# Altium PCB 1.PcbDoc (part 1 of 2)
Units mil, origin at the board's own origin, x right, y up, seen from the top; angles counter-clockwise.
Board outline 9055.12 x 5905.51 mil, 2 copper layers (Top Layer, Bottom Layer); 240 components, 221 nets, 945 pads, 455 vias.
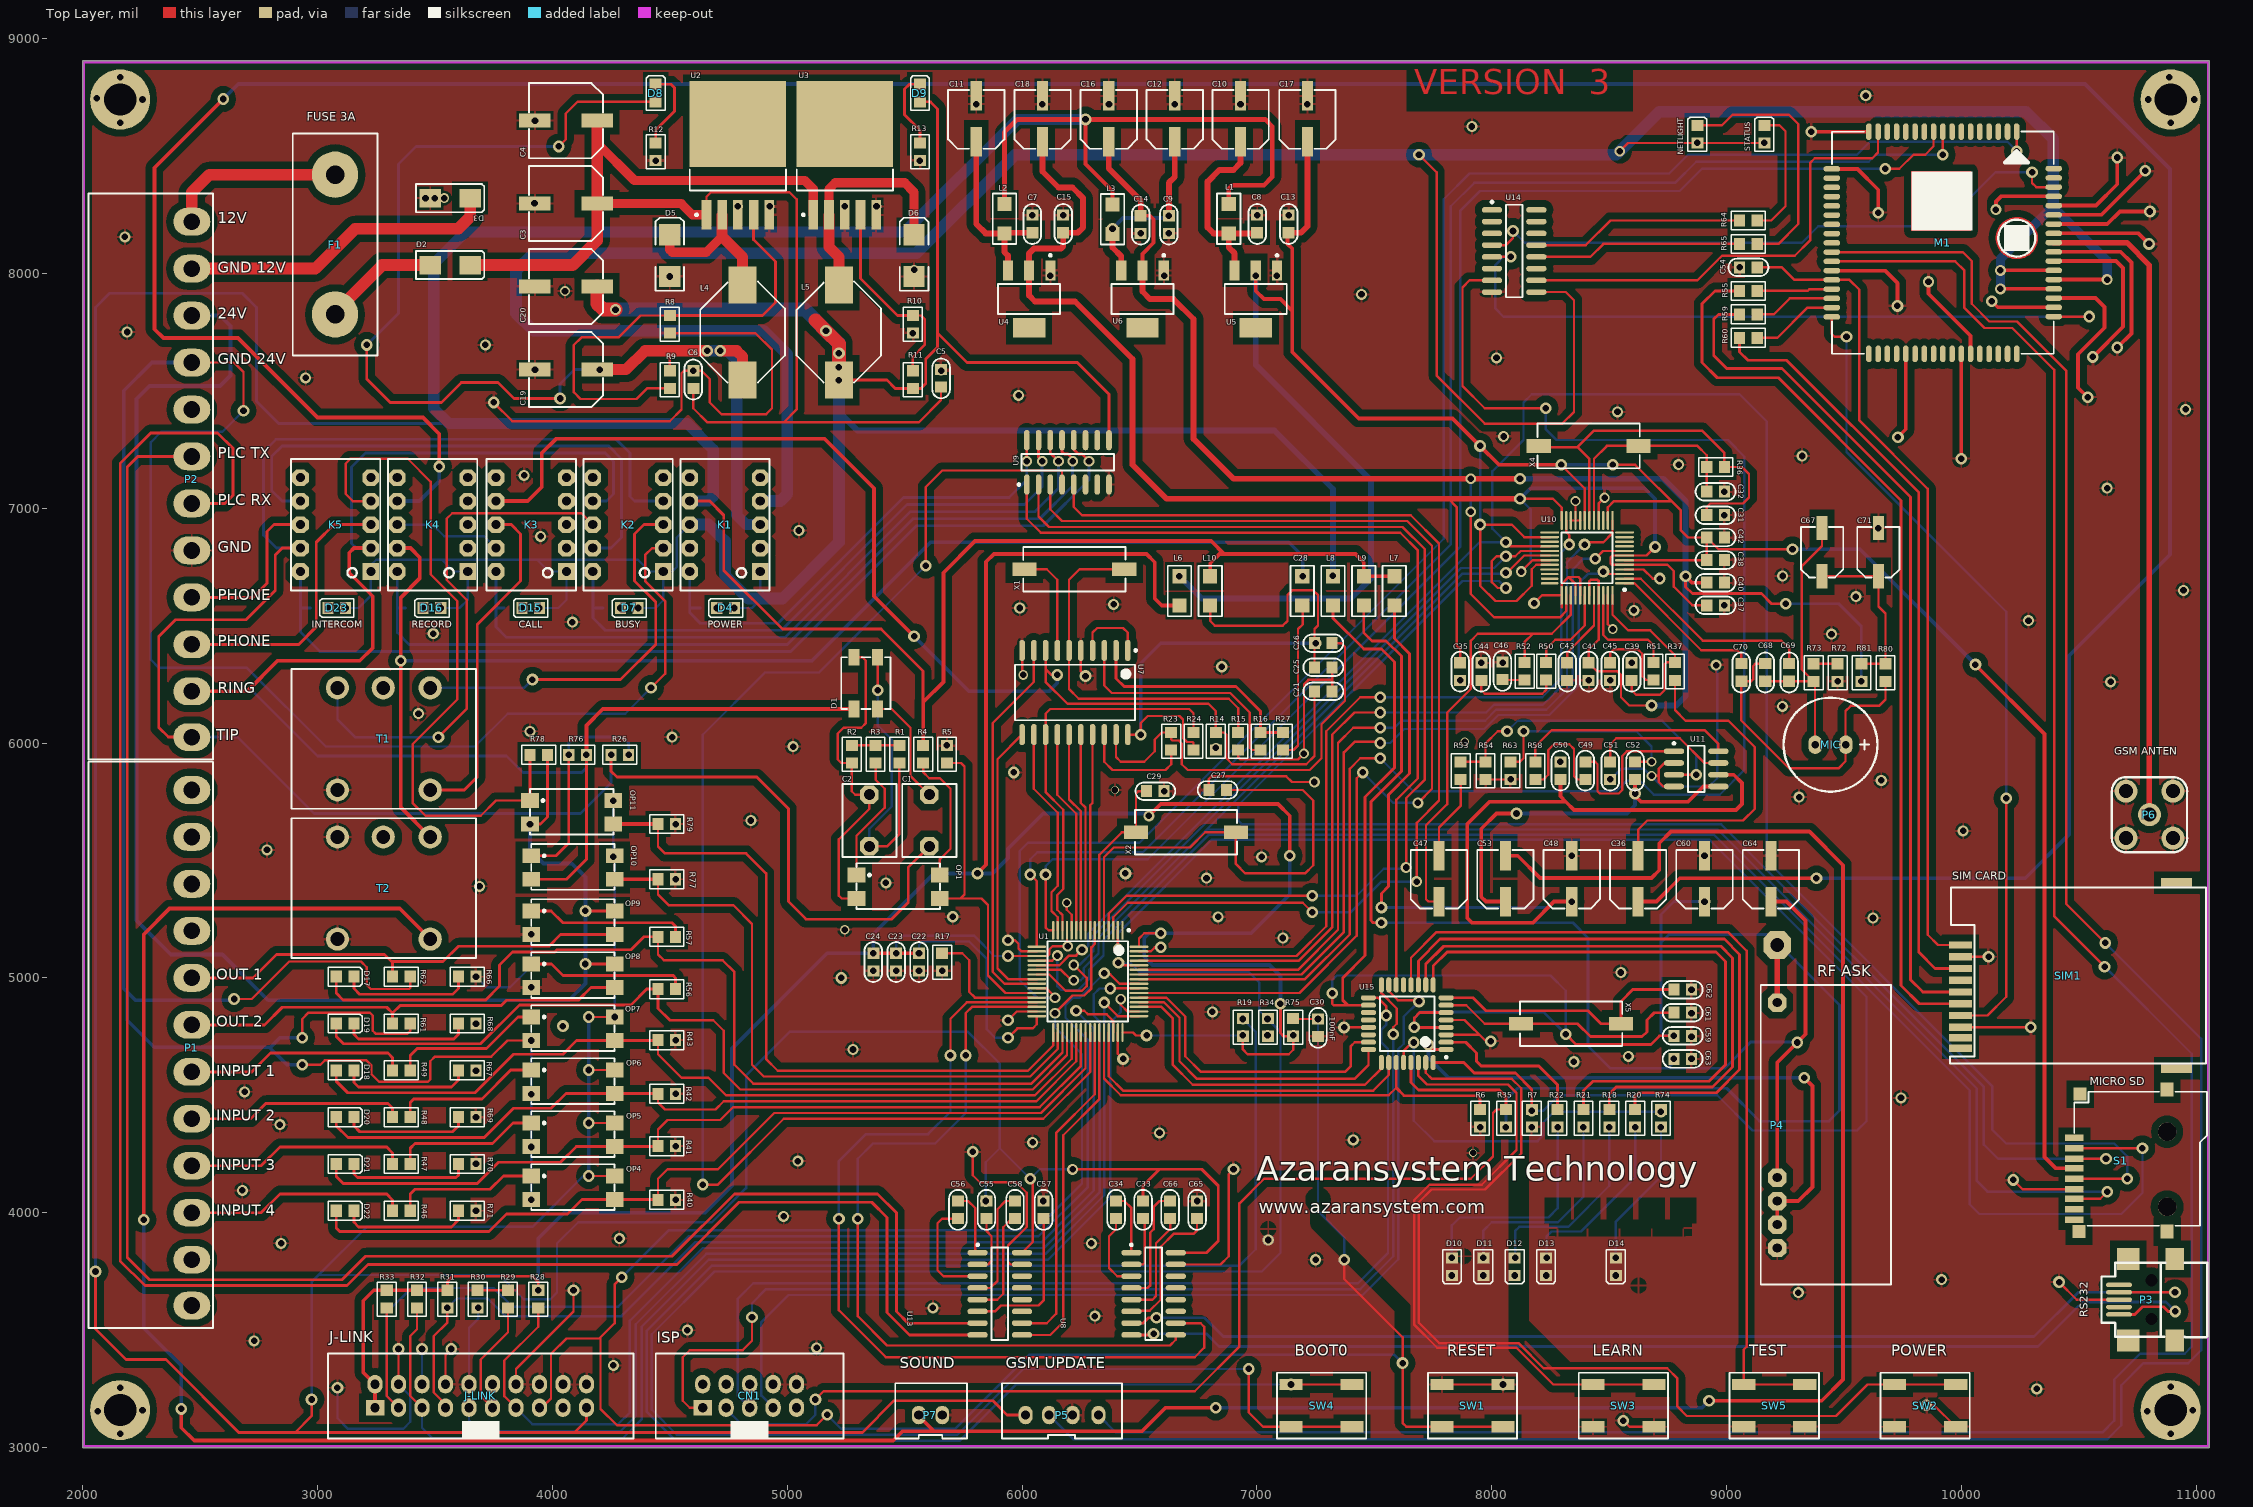
[diagram p0: Top Layer view]
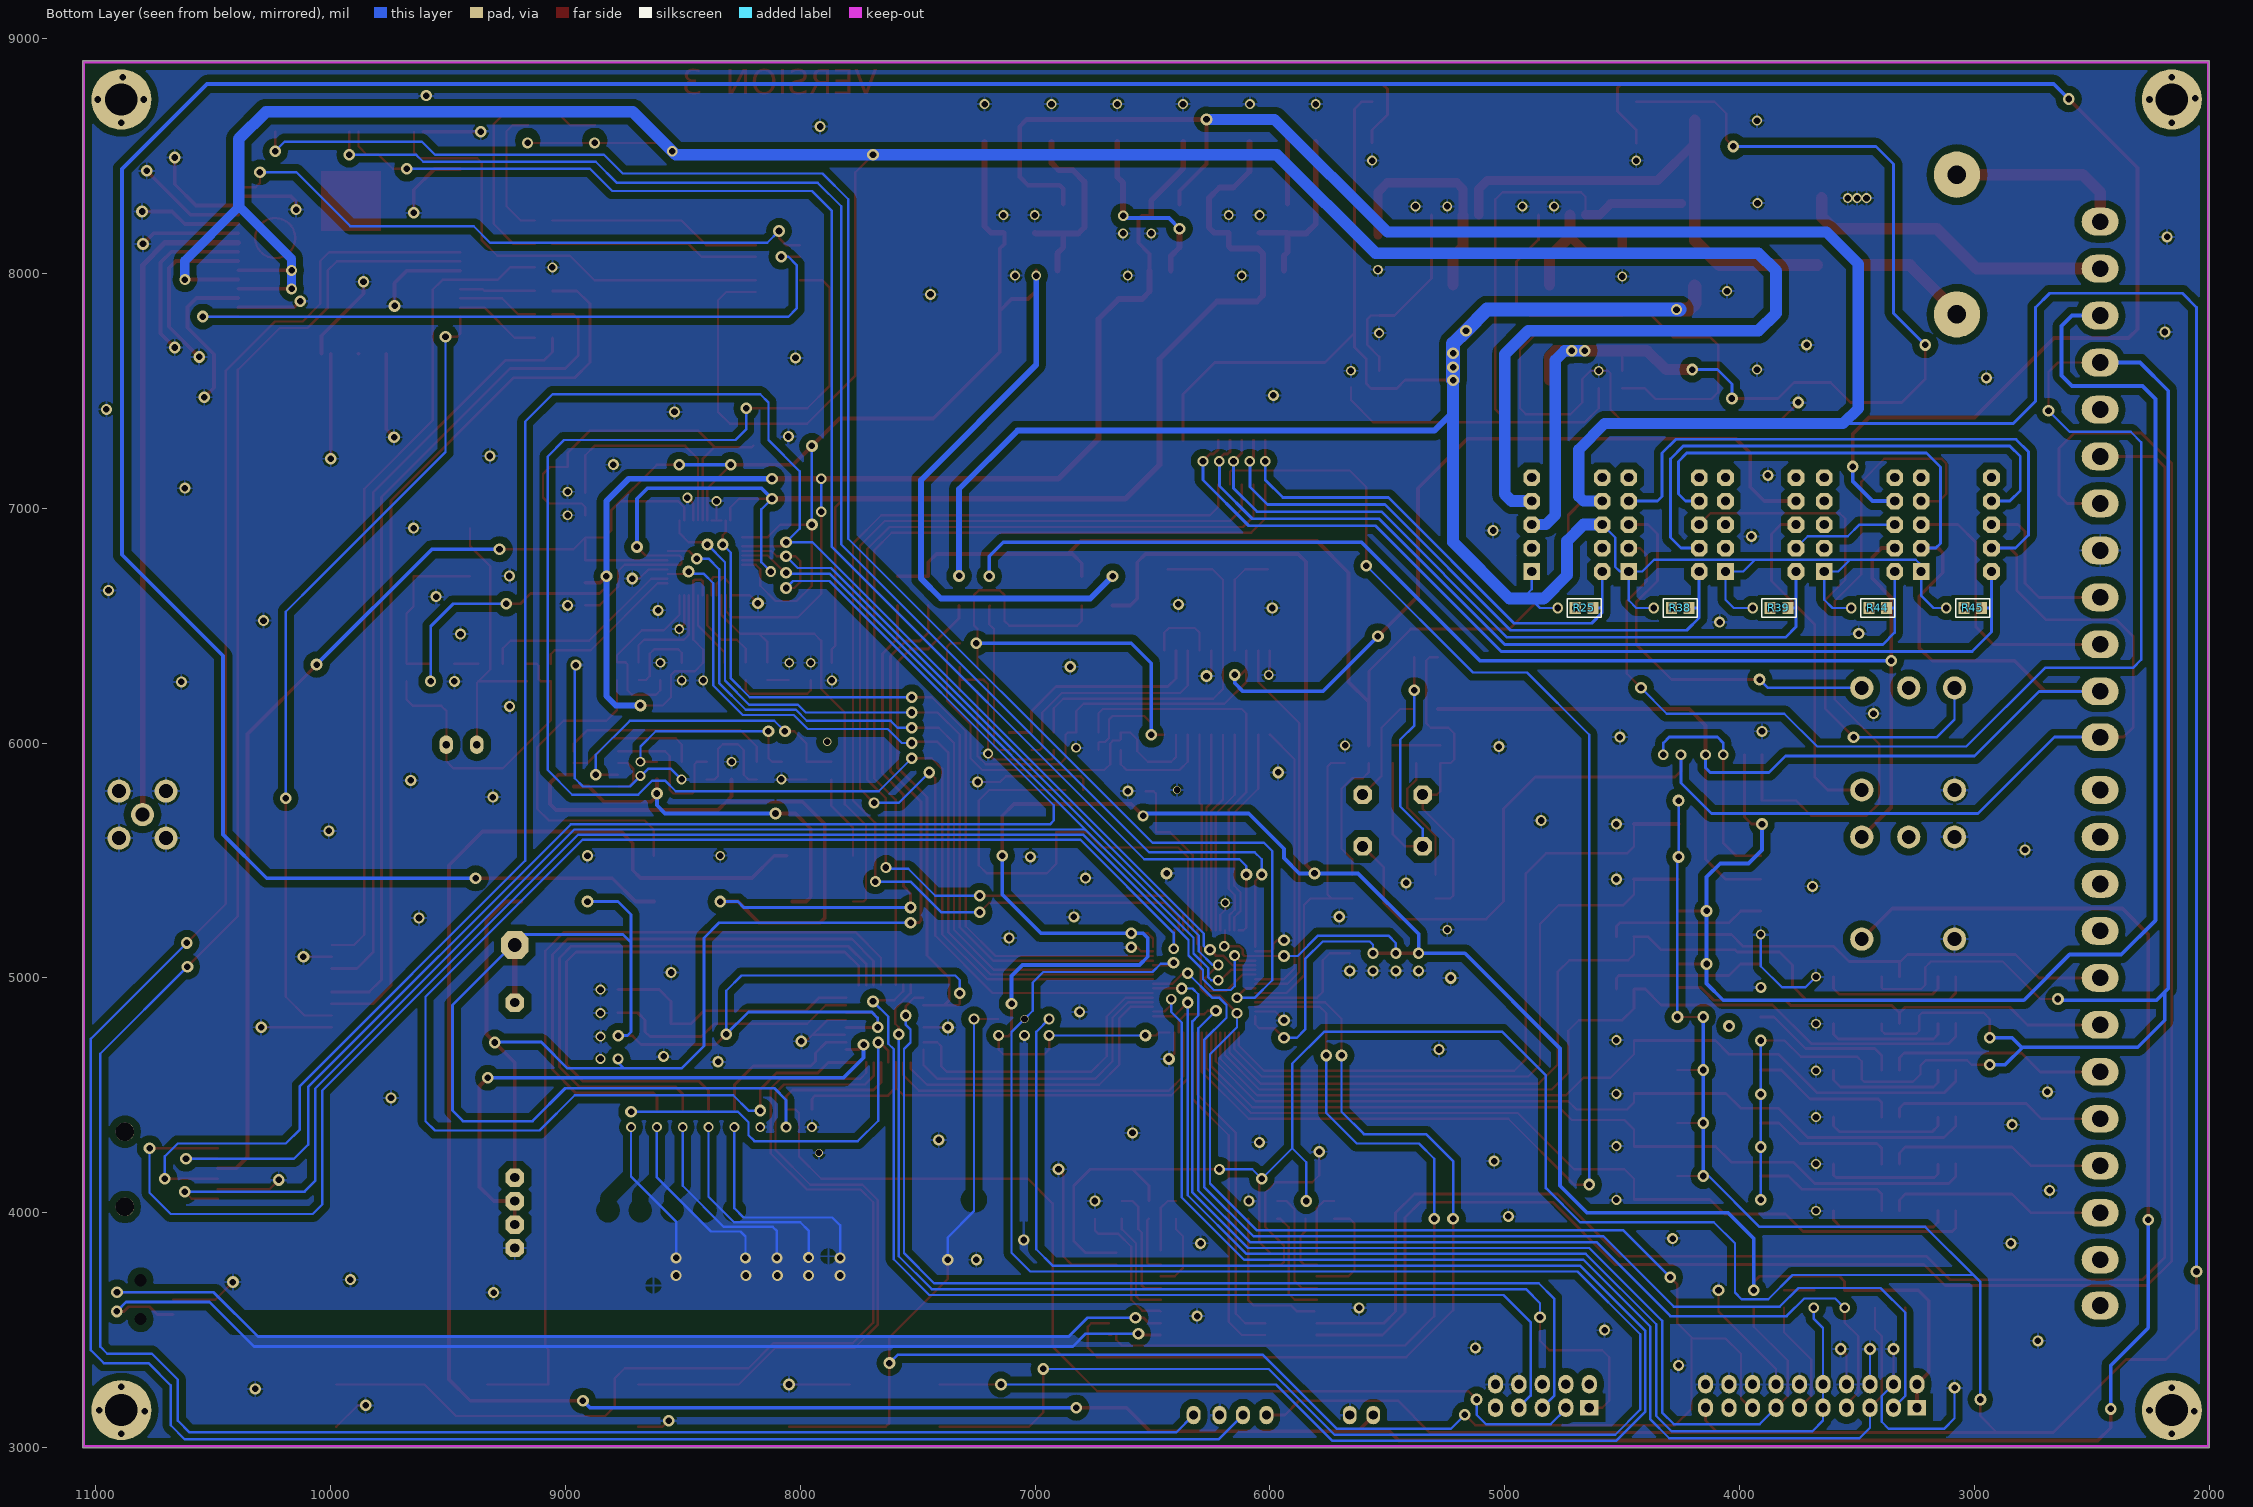
[diagram p1: Bottom Layer view, seen from below]

## Layer stack, top to bottom
Top Layer: signal copper 1.4
Dielectric: dielectric 12.6, FR-4, Dk 4.8
Bottom Layer: signal copper 1.4

## Board outline
2000,3000 11055.12,3000 11055.12,8905.51 2000,8905.51

## Design rules (kind name [scope] priority, off if disabled: settings)
Clearance [All] p1: gap=10
PolygonConnect [All] p1: connectstyle=Relief reliefconductorwidth=10 reliefentries=4 polygonreliefangle="90 Angle" airgapwidth=10
RoutingVias [All] p1: holewidth=31.5 width=62.99 viastyle="Through Hole" minholewidth=28 minwidth=50 maxholewidth=28 maxwidth=50
SilkToSolderMaskClearance SilkscreenOverComponentPads [IsPad] p1: minsilkscreentomaskgap=10 clearancetoexposedcopper=TRUE
SolderMaskExpansion [All] p1: expansion=4
Width [All] p1: maxlimit=200 minlimit=8 preferedwidth=10
27 further rules are at their usual default settings.

## Classes and differential pairs
component class "SmartHome V3": C1 C2 C22 C23 C24 C27 C29 C30 C33 C34 C55 C56 C57 C58 C59 C60 C61 C62 C63 C64 C65 C66 CN1 D1 D4 D7 D10 D11 D12 D13 D14 D15 D16 D17 D18 D19 D20 D21 D22 D23 D? J-LINK K1 L6 L8 L9 OP1 OP4 OP5 OP6 OP7 OP8 OP9 OP11 P1 P2 P3 P4 R1 R2 R3 R4 R5 R6 R7 R17 R18 R19 R20 R21 R22 R25 R28 R29 R30 R31 R32 R33 R34 R35 R38 R39 R40 R41 R42 R43 R44 R45 R46 R47 R48 R49 R56 R57 R61 R62 R66 R67 R68 R69 R70 R71 R74 R75 R77 S1 SW1 SW2 SW3 SW4 SW5 T2 U1 U8 U9 U13 U15 X2 X5
component class SIM900: C54 M1 NETLIGHT P5 P6 R55 R59 R60 R64 R65 SIM1 STATUS U14
component class VS1003: C31 C32 C35 C36 C37 C38 C39 C40 C41 C42 C43 C44 C45 C46 C47 C48 C49 C50 C51 C52 C53 C67 C68 C69 C70 C71 L7 MIC P7 R36 R37 R50 R51 R52 R53 R54 R58 R63 R72 R73 R80 R81 U10 U11 X4

## Components (designator, comment, footprint, x,y, rotation, side; value= is the part's Value field where it differs from the comment)
C1 "100nF / 100V" RAD-0.3 5605,5670 r270 top
C2 "100nF / 100V" RAD-0.3 5350,5670 r270 top
C3 "470UF / 16V" 470UF-SMD 4186,8297 r180 top
C4 "470UF / 16V" 470UF-SMD 4186,8650 r180 top
C5 "100nF" 0805C 5655,7510 r90 top
C6 "100nF" 0805C 4600,7505 r90 top
C7 "100nF" 0805C 6043.65,8167.4 r90 top
C8 "100nF" 0805C 7001.15,8167.4 r90 top
C9 "100nF" 0805C 6625,8250 r270 top
C10 "100uF / 16V SMD" 100UF-SMD 6930,8560 r90 top
C11 "100uF / 16V SMD" 100uf-smd 5805,8560 r90 top
C12 "100uF / 16V SMD" 100uf-smd 6650,8560 r90 top
C13 "100nF" 0805C 7135,8167.4 r90 top
C14 "100nF" 0805C 6505,8250 r270 top
C15 "100nF" 0805C 6175,8167.4 r90 top
C16 "100uF / 16V SMD" 100uf-smd 6369,8560 r90 top
C17 "100uF / 16V SMD" 100uf-smd 7215,8560 r90 top
C18 "100uF / 16V SMD" 100uf-smd 6087,8560 r90 top
C19 "470UF / 16V" 470UF-SMD 4186,7590 r180 top
C20 "470UF / 16V" 470UF-SMD 4186,7943.33 r180 top
C21 "10nF" 0805c 7240,6220 r0 top
C22 "100nF" 0805C 5561.16,5110 r270 top
C23 "100nF" 0805C 5463.82,5110 r270 top
C24 "100nF" 0805C 5366.49,5110 r270 top
C25 "100nF" 0805c 7325,6322.3 r180 top
C26 "100nF" 0805c 7240,6425 r0 top
C27 "15PF" 0805c 6875,5800 r180 top
C28 "100uF / 100V" 1206 7192.86,6715 r270 top
C29 "15PF" 0805c 6525,5795 r0 top
C30 "100nF" 0805C 7260,4830 r270 top
C31 "30pF" 0805c 8910,6970 r0 top
C32 "30pF" 0805c 8910,7070 r0 top
C33 "100nF" 0805C 6514.93,3970 r90 top
C34 "100nF" 0805c 6400,3970 r90 top
C35 "100nF" 0805C 7865,6261.61 r90 top
C36 "100uF / 16V SMD" 100UF-SMD 8622.8,5325 r90 top
C37 "100nF" 0805C 8995,6586.25 r180 top
C38 "100nF" 0805C 8995,6778.75 r180 top
C39 "10nF" 0805C 8595.33,6261.61 r90 top
C40 "100nF" 0805C 8995,6682.5 r180 top
C41 "100nF" 0805C 8412.38,6261.61 r90 top
C42 "100nF" 0805C 8995,6875 r180 top
C43 "100nF" 0805C 8320.9,6261.61 r90 top
C44 "10nF" 0805C 7955,6261.61 r90 top
C45 "10nF" 0805C 8504.06,6346.61 r270 top
C46 "10nF" 0805C 8045,6265 r90 top
C47 "100uF / 16V SMD" 100UF-SMD 7775,5325 r90 top
C48 "100uF / 16V SMD" 100uf-smd 8340.2,5325 r90 top
C49 "100nF" 0805C 8397.94,5840 r90 top
C50 "100nF" 0805c 8292.01,5840 r90 top
C51 "100nF" 0805c 8503.87,5840 r90 top
C52 "100nF" 0805c 8610,5925 r270 top
C53 "100uF / 16V SMD" 100UF-SMD 8057.6,5325 r90 top
C54 "100nF" 0805C 9135,8025 r180 top
C55 "100nF" 0805C 5848.2,3970 r90 top
C56 "100nF" 0805c 5726.6,3970 r90 top
C57 "100nF" 0805c 6091.6,4055 r270 top
C58 "100nF" 0805c 5970,4055 r270 top
C59 "100nF" 0805C 8770,4753.33 r0 top
C60 "100uF / 16V SMD" 100UF-SMD 8905.4,5325 r90 top
C61 "15PF" 0805c 8770,4851.67 r0 top
C62 "15PF" 0805c 8770,4950 r0 top
C63 "100nF" 0805C 8770,4655 r0 top
C64 "100uF / 16V SMD" 100UF-SMD 9188,5325 r90 top
C65 "100nF" 0805c 6745,4055 r270 top
C66 "100nF" 0805c 6630.07,4055 r270 top
C67 "10uF" 10UF-SMD 9406,6735 r90 top
C68 "100pF" 0805C 9164.08,6343 r270 top
C69 "100nF" 0805C 9265.76,6258 r90 top
C70 "100nF" 0805C 9062,6258 r90 top
C71 "10uF" 10UF-SMD 9646,6735 r90 top
CN1 "ISP" IDC2.54-V10D 4840,3220 r0 top locked
D1 "HD08-T" HD08-T 5385,6365 r270 top
D2 "Diode" Diode 3580,8035 r0 top
D3 "Diode" Diode 3580,8320 r0 top
D4 "LED" 0805d 4775,6575 r180 top
D5 "1N5822" SMB 4500,8075 r90 top
D6 "1N5822" SMB 5540,8075 r90 top
D7 "LED" 0805d 4365,6575 r180 top
D8 "LED" 0805D 4440,8730 r90 top
D9 "LED" 0805D 5565,8730 r90 top
D10 "LED" 0805D 7830,3808 r270 top
D11 "LED" 0805D 7963.67,3808 r270 top
D12 "LED" 0805D 8097.33,3808 r270 top
D13 "LED" 0805D 8231,3808 r270 top
D14 "LED" 0805D 8528,3808 r270 top
D15 "LED" 0805d 3945,6575 r180 top
D16 "LED" 0805d 3525,6575 r180 top
D17 "LED" 0805D 3080,5005 r0 top
D18 "LED" 0805D 3080,4606.43 r0 top
D19 "LED" 0805D 3080,4805.71 r0 top
D20 "LED" 0805D 3080,4407.14 r0 top
D21 "LED" 0805D 3080,4207.86 r0 top
D22 "LED" 0805D 3080,4008.57 r0 top
D23 "LED" 0805d 3120,6575 r180 top
F1 "FUSE 3A" FUSE 3075,8420 r270 top
J-LINK "IDC 20" IDC2.54-V20D 3695,3220 r0 top locked
K1 "RELAY 5V" "RELAY G6H" 4885,6730 r180 top locked
K2 "RELAY 5V" "RELAY G6H" 4472.5,6730 r180 top locked
K3 "RELAY 5V" "RELAY G6H" 4060,6730 r180 top locked
K4 "RELAY 5V" "RELAY G6H" 3640,6730 r180 top locked
K5 "RELAY 5V" "RELAY G6H" 3227.5,6730 r180 top locked
L1 "FREAT" 1206 6880,8300 r270 top
L2 "FREAT" 1206 5925,8300 r270 top
L3 "FREAT" 1206 6385,8297.6 r270 top
L4 "100UH" 100uh 4810,7945 r270 top
L5 "100UH" 100uh 5220,7945 r270 top
L6 "FREAT" 1206 6670,6580 r90 top
L7 "FREAT" 1206 7585,6580 r90 top
L8 "FREAT" 1206 7323.57,6580 r90 top
L9 "FREAT" 1206 7455,6715 r270 top
L10 "FREAT" 1206 6800.71,6580 r90 top
M1 "sim900" sim900 9920,8130 r270 top locked
MIC "CON 2PIN" Microphone 9442,5993 r0 top
NETLIGHT "LED" 0805D 8875,8555 r90 top
OP1 "EL817" EL817 5295,5437.86 r0 top
OP4 "EL817" EL817 3910,4156.43 r0 top
OP5 "EL817" EL817 3910,4382.14 r0 top
OP6 "EL817" EL817 3910,4607.86 r0 top
OP7 "EL817" EL817 3910,4833.57 r0 top
OP8 "EL817" EL817 3910,5059.29 r0 top
OP9 "EL817" EL817 3910,5285 r0 top
OP10 "EL817" EL817 3910,5520 r0 top
OP11 "EL817" EL817 3905,5755 r0 top
P1 "FONIX-12" Fonit_Conector 2465,5800 r270 top locked
P2 "FONIX-12" Fonit_Conector 2465,8220 r270 top locked
P3 "CON 4" miniUSB 10670,3630 r270 top
P4 "RF ASK" ASK-RF 9215,3850 r90 top locked
P5 "CON 4" CON_4PIN 6015,3138.9 r0 top
P6 "GSM ANTEN" anten-jack 10800,5695 r0 top
P7 "CON 2PIN" CON_2PIN 5560,3138.9 r0 top
R1 "2.2K" 0805 5477.5,5915 r90 top
R2 "100K" 0805 5275,5990 r270 top
R3 "330R" 0805 5376.25,5990 r270 top
R4 "330R" 0805 5578.75,5915 r90 top
R5 "10K" 0805 5680,5990 r270 top
R6 "10K" 0805 7950,4440 r270 top
R7 "10K" 0805 8170,4440 r270 top
R8 "4.7K" 0805 4500,7745 r90 top
R9 "10K" 0805 4500,7510 r90 top
R10 "3.3K" 0805 5535,7745 r90 top
R11 "10K" 0805 5535,7585 r270 top
R12 "1K" 0805 4440,8555 r270 top
R13 "1K" 0805 5565,8555 r270 top
R14 "10K" 0805 6825,5970 r90 top
R15 "4.7M" 0805 6920,5970 r90 top
R16 "100K" 0805 7015,5970 r90 top
R17 "10K" 0805 5660,5030 r90 top
R18 "1K" 0805 8500,4440 r270 top
R19 "10K" 0805 6940,4826.61 r270 top
R20 "1K" 0805 8610,4440 r270 top
R21 "1K" 0805 8390,4440 r270 top
R22 "1K" 0805 8280,4440 r270 top
R23 "374K" 0805 6635,6045 r270 top
R24 "3.3K" 0805 6730,5970 r90 top
R25 "1K" 0805 4700,6575 r180 bottom
R26 "47K" 0805 4325,5950 r180 top
R27 "100K" 0805 7110,6045 r270 top
R28 "10K" 0805 3940,3595 r90 top
R29 "10K" 0805 3811,3595 r90 top
R30 "10K" 0805 3682,3595 r90 top
R31 "10K" 0805 3553,3595 r90 top
R32 "10K" 0805 3424,3595 r90 top
R33 "10K" 0805 3295,3595 r90 top
R34 "1K" 0805 7047.17,4826.61 r270 top
R35 "3.3K" 0805 8060,4440 r270 top
R36 "1M" 0805 8915,7175 r0 top
R37 "470R" 0805 8780,6342 r270 top
R38 "1K" 0805 4290,6575 r180 bottom
R39 "1K" 0805 3870,6575 r180 bottom
R40 "10K" 0805 4450,4055 r0 top
R41 "10K" 0805 4450,4283.57 r0 top
R42 "10K" 0805 4450,4506.43 r0 top
R43 "10K" 0805 4450,4735 r0 top
R44 "1K" 0805 3450,6575 r180 bottom
R45 "1K" 0805 3045,6575 r180 bottom
R46 "10K" 0805 3320,4008.57 r0 top
R47 "10K" 0805 3320,4207.86 r0 top
R48 "10K" 0805 3320,4407.14 r0 top
R49 "10K" 0805 3320,4606.43 r0 top
R50 "22R" 0805 8231.14,6268.23 r90 top
R51 "22R" 0805 8688.52,6268.23 r90 top
R52 "22R" 0805 8139.67,6268.23 r90 top
R53 "1K" 0805 7867.21,5845 r90 top
R54 "100R" 0805 7973.14,5920 r270 top
R55 "22R" 0805 9055,7925 r0 top
R56 "1K" 0805 4525,4952.14 r180 top
R57 "1K" 0805 4525,5175 r180 top
R58 "100K" 0805 8185,5845 r90 top
R59 "22R" 0805 9130,7825 r180 top
R60 "22R" 0805 9130,7725 r180 top
R61 "10K" 0805 3395,4805.71 r180 top
R62 "10K" 0805 3395,5005 r180 top
R63 "100R" 0805 8079.07,5920 r270 top
R64 "1K" 0805 9130,8225 r180 top
R65 "1K" 0805 9130,8125 r180 top
R66 "1K" 0805 3600,5005 r0 top
R67 "1K" 0805 3600,4606.43 r0 top
R68 "1K" 0805 3600,4805.71 r0 top
R69 "1K" 0805 3600,4407.14 r0 top
R70 "1K" 0805 3600,4207.86 r0 top
R71 "1K" 0805 3600,4008.57 r0 top
R72 "1K" 0805 9472.24,6337.61 r270 top
R73 "1K" 0805 9370.36,6262.61 r90 top
R74 "1K" 0805 8720,4440 r270 top
R75 "4.7K" 0805 7154.34,4826.61 r270 top
R76 "10K" 0805 4070,5950 r0 top
R77 "4.7K" 0805 4450,5420 r0 top
R78 "220" 0805 3905,5950 r0 top
R79 "4.7K" 0805 4450,5655 r0 top
R80 "1K" 0805 9676,6337.61 r270 top
R81 "1K" 0805 9574.12,6262.61 r90 top
S1 "MICRO SD" MicroSD 10500,4320 r0 top locked
SIM1 "SIM CARD SOKET" "SIM HOLDER 2" 10000,5140 r0 top locked
STATUS "LED" 0805D 9160,8555 r90 top
SW1 "SWITCH" SWICH 7917.5,3178.9 r90 top
SW2 "SWITCH" SWICH 9845,3178.9 r270 top
SW3 "SWITCH" SWICH 8560,3178.9 r270 top
SW4 "SWITCH" SWICH 7275,3178.9 r90 top
SW5 "SWITCH" SWICH 9202.5,3178.9 r270 top
T1 "TRANCE 300 :300" trance 3480,5800 r180 top locked
T2 "TRANCE 300 :300" trance 3480,5165 r180 top locked
U1 "STM32F103RBT6" LQFP64_L 6280,4985 r270 top locked
U2 "LM2576S-ADJ" TS5B_N 4790,8484.92 r90 top
U3 "LM2576S-ADJ" TS5B_N 5245,8484.92 r90 top
U4 "AMS1117-2.5V" sot223 6030,7890 r180 top
U5 "AMS1117-3.3V" sot223 6995,7890 r180 top
U6 "AMS1117-2.8V" sot223 6512.5,7890 r180 top
U7 "MT8888CS" SOIC20_N 6225,6215 r270 top locked
U8 "MAX232AEWE" L16_N 6560,3655 r0 top locked
U9 "ULN2003L" L16_N 6195,7195 r90 top locked
U10 "VS1003" 48A 8565,6680 r180 top locked
U11 "LM386M" M08A_N 8870,5890 r0 top locked
U13 "MAX232AEWE" L16_N 5905,3655 r0 top locked
U14 "ULN2003L" L16_N 8095,8095 r0 top locked
U15 "ATmega8A-AU" 32A_N 7640,4805 r180 top locked
X1 "3.579545 MHz" crystal 6435,6740 r180 top locked
X2 "8MHz" crystal 6485,5620 r0 top
X4 "12.288MHz" crystal 8625,7265 r180 top
X5 "16MHz" crystal 8125,4805 r0 top locked

## Footprints (in the part's own frame and the unit in brackets; to place one, negate y for a bottom-side part, rotate by r counter-clockwise, add the part's x,y. Pads: shape width x height; smd on the part's side, far side on the other; paste and mask are expansions set on the pad)
10UF-SMD [mm]
  rect 2.6x1.2 smd: 1(-0.635,0) 2(4.572,0)
  silkscreen extent -0.76,-2.29 4.7,2.29
32A_N [mm] "Thin QFP, 32-Leads, Body 7x7mm, Pitch 0.8mm, IPC Medium Density"
  oval 1.65x0.55 smd: 1(-4.2,2.8) 2(-4.2,2) 3(-4.2,1.2) 4(-4.2,0.4) 5(-4.2,-0.4) 6(-4.2,-1.2) 7(-4.2,-2) 8(-4.2,-2.8) 17(4.2,-2.8) 18(4.2,-2) 19(4.2,-1.2) 20(4.2,-0.4) 21(4.2,0.4) 22(4.2,1.2) 23(4.2,2) 24(4.2,2.8)
  oval 0.55x1.65 smd: 9(-2.8,-4.2) 10(-2,-4.2) 11(-1.2,-4.2) 12(-0.4,-4.2) 13(0.4,-4.2) 14(1.2,-4.2) 15(2,-4.2) 16(2.8,-4.2) 25(2.8,4.2) 26(2,4.2) 27(1.2,4.2) 28(0.4,4.2) 29(-0.4,4.2) 30(-1.2,4.2) 31(-2,4.2) 32(-2.8,4.2)
  silkscreen extent -4.33,-2.95 2.95,3.75, body extent -3.5,-3.5 3.5,3.5, height 1.2
48A [mil]
  oval 80x10 smd: 1(0,0) 2(0,-19.69) 3(0,-39.37) 4(0,-59.06) 5(0,-78.74) 6(0,-98.43) 7(0,-118.11) 8(0,-137.8) 9(0,-157.48) 10(0,-177.17) 11(0,-196.85) 12(0,-216.54) 25(318.9,-216.54) 26(318.9,-196.85) 27(318.9,-177.17) 28(318.9,-157.48) 29(318.9,-137.8) 30(318.9,-118.11) 31(318.9,-98.43) 32(318.9,-78.74) 33(318.9,-59.06)
  oval 10x80 smd: 13(51.18,-267.72) 14(70.87,-267.72) 15(90.55,-267.72) 16(110.24,-267.72) 17(129.92,-267.72) 18(149.61,-267.72) 19(169.29,-267.72) 20(188.98,-267.72) 21(208.66,-267.72) 22(228.35,-267.72) 23(248.03,-267.72) 24(267.72,-267.72) 37(267.72,51.18) 38(248.03,51.18) 39(228.35,51.18) 40(208.66,51.18) 41(188.98,51.18) 42(169.29,51.18) 43(149.61,51.18) 44(129.92,51.18) 45(110.24,51.18) 46(90.55,51.18) 47(70.87,51.18) 48(51.18,51.18)
  oval 75x10 smd: 34(318.9,-39.37) 35(318.9,-19.69) 36(318.9,0)
  silkscreen extent -5,-217 268,32
100UF-SMD [mm]
  rect 3.2x1.2 smd: 1(0,0) 2(4.953,0)
  silkscreen extent -0.76,-3.05 5.59,3.05
100uf-smd [mm]
  rect 3.2x1.2 smd: 1(0,0) 2(4.953,0)
  silkscreen extent -0.76,-3.05 5.59,3.05
100uh [mm]
  rect 4x3 smd: 1(-0.127,0) 2(10.16,0)
  silkscreen extent -0.51,-4.57 10.41,4.57
470UF-SMD [mm]
  rect 3.4x1.5 smd: 1(-0.127,0) 2(6.604,0)
  silkscreen extent -0.76,-4.06 7.24,4.06
0805 [mm]
  rect 1.2x1.3 smd: 1(0,0) 2(1.905,0)
  silkscreen extent -0.89,-1.02 2.79,1.02
0805C [mm]
  rect 1.2x1.3 smd: 1(0.127,0) 2(2.032,0)
  silkscreen extent -1.07,-0.95 3.23,0.95
0805c [mm]
  rect 1.2x1.3 smd: 1(0.127,0) 2(2.032,0)
  silkscreen extent -1.07,-0.95 3.23,0.95
0805d [mm] "SM LED; 2 C-Bend Leads; Body 3.5 x 2.8 x 1.9 mm, inc leads (LxWxH typ)"
  rect 1.2x1.3 smd: 1(0,0) 2(1.905,0)
  silkscreen extent -0.89,-1.02 2.79,1.02
0805D [mm] "SM LED; 2 C-Bend Leads; Body 3.5 x 2.8 x 1.9 mm, inc leads (LxWxH typ)"
  rect 1.2x1.3 smd: 1(0,0) 2(1.905,0)
  silkscreen extent -0.89,-1.02 2.79,1.02
1206 [mil]
  rect 60x60 smd: 1(5,0) 2(130,0)
  silkscreen extent -40,-50 175,50
anten-jack [mm]
  round 2.5 hole 1.5: 1(0,0) 2(-2.54,-2.54) 2(-2.54,2.54) 2(2.54,-2.54) 2(2.54,2.54)
  silkscreen extent -4.06,-4.06 4.07,4.07
ASK-RF [mm] "Connector; Header; 4 Position"
  oct 2x2 hole 1: 1(0,0) 2(2.54,0) 3(5.08,0) 4(7.62,0) 5(26.543,0)
  silkscreen extent -3.94,-12.32 28.45,1.78
CON_2PIN [mm] "Connector; Header; 2 Position; Right Angle"
  oval 1.5x2 hole 1: 1(0,0) 2(2.54,0)
  silkscreen extent -2.54,-2.54 5.21,3.43
CON_4PIN [mm]
  oval 1.5x2 hole 1: 1(0,0) 2(2.54,0) 3(5.08,0) 4(7.874,0)
  silkscreen extent -2.54,-2.54 10.41,3.43
crystal [mm]
  rect 2.6x1.5 smd: 1(0,0) 2(10.8,0)
  silkscreen extent -0.13,-2.41 10.92,2.41
Diode [mm] "DO-214-AA/SMB; 2 C-Bend Leads; Body 5.3 x 3.6 mm, inc. leads (LxW)"
  rect 2.3x2 smd: 1(-2.54,0) 2(1.778,0)
  silkscreen extent -4.06,-1.52 3.3,1.52
EL817 [mm]
  rect 1.9x1.6 smd: 1(0,0) 2(0,-2.54) 3(9.017,-2.54) 4(9.017,0)
  silkscreen extent 0,-3.68 9.02,1.27
Fonit_Conector [mm]
  oval 3x4 hole 1.8: 1(0,0) 2(5.08,0) 3(10.16,0) 4(15.24,0) 5(20.32,0) 6(25.4,0) 7(30.48,0) 8(35.56,0) 9(40.64,0) 10(45.72,0) 11(50.8,0) 12(55.753,0)
  silkscreen extent -3.05,-11.18 58.17,2.29
FUSE [mm]
  round 5 hole 2: 1(0,0) 2(15.113,0)
  silkscreen extent -4.45,-4.57 19.56,4.57
HD08-T [mm]
  rect 1.8x1.2 smd: 1(0,0) 2(5.588,0) 3(0,-2.54) 4(5.588,-2.54)
  silkscreen extent 0,-3.94 5.59,1.4
IDC2.54-V10D [mm] "Connector; IDC, Low Profile Male Header, Thru-Hole; 10 Position; Vertical; Pitch 2.54 mm; Body 20.32 x 9.2 x 9.45 mm (LxWxH)"
  rect 2x1.65 hole 1: 1(-5.08,-1.27)
  oval 1.65x2 hole 1: 2(-5.08,1.27) 3(-2.54,-1.27) 4(-2.54,1.27) 5(0,-1.27) 6(0,1.27) 7(2.54,-1.27) 8(2.54,1.27) 9(5.08,-1.27) 10(5.08,1.27)
  silkscreen extent -10.16,-4.6 10.16,4.6, body extent -10.16,-4.6 10.16,4.6, height 9.45
IDC2.54-V20D [mm] "Connector; IDC, Low Profile Male Header, Thru-Hole; 20 Position; Vertical; Pitch 2.54 mm; Body 33.02 x 9.2 x 9.45 mm (LxWxH)"
  rect 2x1.65 hole 1: 1(-11.43,-1.27)
  oval 1.65x2 hole 1: 2(-11.43,1.27) 3(-8.89,-1.27) 4(-8.89,1.27) 5(-6.35,-1.27) 6(-6.35,1.27) 7(-3.81,-1.27) 8(-3.81,1.27) 9(-1.27,-1.27) 10(-1.27,1.27) 11(1.27,-1.27) 12(1.27,1.27) 13(3.81,-1.27) 14(3.81,1.27) 15(6.35,-1.27) 16(6.35,1.27) 17(8.89,-1.27) 18(8.89,1.27) 19(11.43,-1.27) 20(11.43,1.27)
  silkscreen extent -16.51,-4.6 16.51,4.6, body extent -16.51,-4.6 16.51,4.6, height 9.45
L16_N [mm] "SOIC, 16-Leads, Body 9.9x3.9mm, Pitch 1.27mm, IPC Medium Density"
  oval 2.2x0.6 smd: 1(-2.4,4.445) 2(-2.4,3.175) 3(-2.4,1.905) 4(-2.4,0.635) 5(-2.4,-0.635) 6(-2.4,-1.905) 7(-2.4,-3.175) 8(-2.4,-4.445) 9(2.4,-4.445) 10(2.4,-3.175) 11(2.4,-1.905) 12(2.4,-0.635) 13(2.4,0.635) 14(2.4,1.905) 15(2.4,3.175) 16(2.4,4.445)
  silkscreen extent -2.52,-5 0.9,5.42, body extent -1.95,-4.95 1.95,4.95, height 1.75
LQFP64_L [mil] "Thin QFP, 64-Leads, Body 10x10mm, Pitch 0.5mm, IPC High Density"
  oval 80x10 smd: 1(-217.52,147.64) 2(-217.52,127.95) 3(-217.52,108.27) 4(-217.52,88.58) 5(-217.52,68.9) 6(-217.52,49.21) 7(-217.52,29.53) 8(-217.52,9.84) 9(-217.52,-9.84) 10(-217.52,-29.53) 11(-217.52,-49.21) 12(-217.52,-68.9) 13(-217.52,-88.58) 14(-217.52,-108.27) 15(-217.52,-127.95) 16(-217.52,-147.64) 33(217.52,-147.64) 34(217.52,-127.95) 35(217.52,-108.27) 36(217.52,-88.58) 37(217.52,-68.9) 38(217.52,-49.21) 39(217.52,-29.53) 40(217.52,-9.84) 41(217.52,9.84) 42(217.52,29.53) 43(217.52,49.21) 44(217.52,68.9) 45(217.52,88.58) 46(217.52,108.27) 47(217.52,127.95) 48(217.52,147.64)
  oval 10x80 smd: 17(-147.64,-217.52) 18(-127.95,-217.52) 19(-108.27,-217.52) 20(-88.58,-217.52) 21(-68.9,-217.52) 22(-49.21,-217.52) 23(-29.53,-217.52) 24(-9.84,-217.52) 25(9.84,-217.52) 26(29.53,-217.52) 27(49.21,-217.52) 28(68.9,-217.52) 29(88.58,-217.52) 30(108.27,-217.52) 31(127.95,-217.52) 32(147.64,-217.52) 49(147.64,217.52) 50(127.95,217.52) 51(108.27,217.52) 52(88.58,217.52) 53(68.9,217.52) 54(49.21,217.52) 55(29.53,217.52) 56(9.84,217.52) 57(-9.84,217.52) 58(-29.53,217.52) 59(-49.21,217.52) 60(-68.9,217.52) 61(-88.58,217.52) 62(-108.27,217.52) 63(-127.95,217.52) 64(-147.64,217.52)
  silkscreen extent -222,-171 171,179, body extent -197,-197 197,197, height 63
M08A_N [mm] "SOIC, 8-Leads, Body 4.9x3.9mm, Pitch 1.27mm, IPC Medium Density"
  oval 2.2x0.6 smd: 1(-2.4,1.905) 2(-2.4,0.635) 3(-2.4,-0.635) 4(-2.4,-1.905) 5(2.4,-1.905) 6(2.4,-0.635) 7(2.4,0.635) 8(2.4,1.905)
  silkscreen extent -2.52,-2.5 0.9,2.88, body extent -2,-2.5 2,2.5, height 1.75
Microphone [mm]
  oval 1.5x2 hole 0.8: 1(-1.651,0) 2(1.651,0)
  silkscreen extent -5.08,-5.08 5.08,5.08
MicroSD [mm]
  rect 2x0.7 smd: 1(-0.508,-1.143) 2(-0.508,-2.286) 4(-0.508,-3.302) 5(-0.508,-4.445) 6(-0.508,-5.588) 7(-0.508,-6.604) 8(-0.508,-7.747) 9(-0.508,0) 10(-0.508,-8.89)
  rect 1.4x1.4 smd: ""(0,-10.16) ""(0.127,4.699)
  rect 1.4x1.5 smd: ""(9.525,-10.16) ""(9.525,5.207)
  round 2 hole 2: ""(9.525,-7.493) ""(9.525,0.635)
  silkscreen extent -0.51,-9.53 13.84,4.95
miniUSB [mm]
  oval 0.483x2.8 smd: 1(1.6,0.009) 2(0.8,0.009) 3(0,0.009) 4(-0.8,0.009) 5(-1.6,0.009)
  rect 2.4x2.4 smd: 6(-4.4,1.009) 7(4.4,1.009)
  rect 2.4x2 smd: 8(4.4,6.009) 9(-4.4,6.009)
  round 0 hole 1.3: 10(-2.1,3.509) 11(2.1,3.509)
  silkscreen extent -4,-1.89 4.06,9.53
RAD-0.3 [mm] "Capacitor; 2 Leads"
  oct 2x2 hole 1.2: 1(-2.794,0) 2(2.794,0)
  silkscreen extent -3.94,-2.92 3.94,2.92
"RELAY G6H" [mm]
  oct 1.8x1.8 hole 1: 1(7.62,0) 2(0,-7.62) 3(0,-5.08) 4(0,-2.54) 5(0,-10.16) 6(7.62,-10.16) 7(7.62,-2.54) 8(7.62,-5.08) 9(7.62,-7.62)
  rect 1.8x1.8 hole 1: 10(0,0)
  silkscreen extent -1.02,-12.19 8.64,2.03
sim900 [mm]
  oval 1.8x0.6 smd mask+0.102: 1(-12.016,7.981) 2(-12.016,7) 3(-12.016,6) 4(-12.016,5) 5(-12.016,4) 6(-12.016,3) 7(-12.016,2) 8(-12.016,1) 9(-12.016,0) 10(-12.016,-1) 11(-12.016,-2) 12(-12.016,-3) 13(-12.016,-4) 14(-12.016,-5) 15(-12.016,-6) 16(-12.016,-7) 17(-12.016,-8) 35(12.016,-8) 36(12.016,-7) 37(12.016,-6) 38(12.016,-5) 39(12.016,-4) 40(12.016,-3) 41(12.016,-2) 42(12.016,-1) 43(12.016,0) 44(12.016,1) 45(12.016,1.994) 46(12.016,3) 47(12.016,4) 48(12.016,5) 49(12.016,6) 50(12.016,7) 51(12.016,8)
  oval 0.6x1.8 smd mask+0.102: 18(-7.984,-12) 19(-6.984,-12) 20(-5.984,-12) 21(-4.984,-12) 22(-3.984,-12) 23(-2.984,-12) 24(-1.985,-12) 25(-0.985,-12) 26(0.015,-12) 27(1.015,-12) 28(2.015,-12) 29(3.015,-12) 30(4.015,-12) 31(5.011,-12) 32(6.015,-12) 33(7.015,-12) 34(8.015,-12) 52(7.984,12) 53(6.984,12) 54(5.984,12) 55(4.984,12) 56(3.984,12) 57(2.984,12) 58(1.985,12) 59(0.985,12) 60(-0.015,12) 61(-1.015,12) 62(-2.015,12) 63(-3.015,12) 64(-4.015,12) 65(-5.015,12) 66(-6.015,12) 67(-7.015,12) 68(-8.015,12)
  Top Layer lines w0.4: 12.016,-1 12,-0.985
  silkscreen extent -12.02,-12 12,12
"SIM HOLDER 2" [mm]
  rect 2.5x0.8 smd: 1(-0.127,0) 2(-0.127,-1.27) 3(-0.127,-2.54) 4(-0.127,-3.81) 5(-0.127,-5.08) 6(-0.127,-6.35) 7(-0.127,-7.62) 8(-0.127,-8.89) 9(-0.127,-10.033) 10(-0.127,-11.176)
  rect 3.4x1 smd: ""(23.241,-13.335) ""(23.241,6.731)
  silkscreen extent -1.27,-12.83 26.42,6.22
SMB [mm] "DO-214-AA/SMB; 2 C-Bend Leads; Body 5.3 x 3.6 mm, inc. leads (LxW)"
  rect 2.3x2.3 smd: 1(-2.25,0) 2(2.25,0)
  silkscreen extent -3.8,-1.55 4.1,1.55
SOIC20_N [mm] "SOIC, 20-Leads, Body 12.8x7.6mm, Pitch 1.27mm, IPC Medium Density"
  oval 2.3x0.6 smd: 1(-4.55,5.715) 2(-4.55,4.445) 3(-4.55,3.175) 4(-4.55,1.905) 5(-4.55,0.635) 6(-4.55,-0.635) 7(-4.55,-1.905) 8(-4.55,-3.175) 9(-4.55,-4.445) 10(-4.55,-5.715) 11(4.55,-5.715) 12(4.55,-4.445) 13(4.55,-3.175) 14(4.55,-1.905) 15(4.55,-0.635) 16(4.55,0.635) 17(4.55,1.905) 18(4.55,3.175) 19(4.55,4.445) 20(4.55,5.715)
  silkscreen extent -4.67,-6.5 3,6.69, body extent -3.75,-6.4 3.75,6.4, height 2.65
sot223 [mm] "SOT-223/SC-73; 4 Leads; Body 6.7 x 7.3 mm, inc. leads (LxW max)"
  rect 1.1x2.15 smd: 1(-2.3,-3.1) 2(0,-3.1) 3(2.3,-3.1)
  rect 3.5x2.15 smd: 4(0,3.1)
  silkscreen extent -3.35,-4.85 3.35,1.62
SWICH [mil]
  rect 47.24x98.43 smd: 1(-90,130) 1(-90,-130) 2(90,130) 2(90,-130)
  silkscreen extent -140,-190 140,190
trance [mm]
  round 2.5 hole 1.5: 1(0,0) 2(10.033,0) 3(0,-11.049) 4(10.033,-11.049) ""(5.08,-11.049)
  silkscreen extent -4.95,-13.08 14.99,2.03
TS5B_N [mm] "D2-PAK, 6-Leads, Body 8.6x10.2mm, Pitch 1.7mm, Lead Span 14.1mm, IPC Medium Density"
  rect 3.2x1.05 smd: 1(-6,3.4) 2(-6,1.7) 3(-6,0) 4(-6,-1.7) 5(-6,-3.4)
  rect 9.3x10.45 smd: 6(3.81,0)
  silkscreen extent -6.12,-5.2 -1.1,5.2, body extent -3.35,-5.2 6.05,5.2, height 4.65

## Part data
C1 C2 C28 C31 C32 C35 C37 C38 C39 C40 C41 C42 C43 C44 C45 C46 C50 C51 C52 C68 C69 C70: library part Cap, "Capacitor"
C3 C4 C19 C20: library part "CAPACITOR POL", "Capacitor"
C5 C6 C7 C8 C9 C13 C14 C15 C21 C22 C23 C24 C25 C26 C54 C59 C63: library part CAP
C10 C11 C12 C16 C17 C18 C36 C47 C48 C53 C60 C64 C67 C71: library part "Cap Pol1", "Polarized Capacitor (Radial)"
C27 C29 C30 C49 C61 C62: library part CAP, "Capacitor"
C33 C34 C55 C56 C57 C58 C65 C66: library part "CAP NP"
CN1: library part "HEADER 5X2"
D1: library part Bridge2, "Diode Bridge"
D2 D3: "Default Diode"
D4 D7 D15 D16 D23: library part LED1, "Typical RED GaAs LED"
D5 D6: library part "D Schottky", "Schottky Diode"
D8 D9 D10 D11 D12 D13 D14 D17 D18 D19 D20 D21 D22: library part LED3, "Typical BLUE SiC LED"
F1: library part FUSE2, "Fuse"
J-LINK: library part "Header 10X2", "Header, 10-Pin, Dual row"
K1 K2 K3 K4 K5: library part "RELAY DPDT-G6HU"
L1 L2 L3 L4 L5 L6 L7 L8 L9 L10: library part Inductor, "Inductor"
MIC P7: library part "Header 2H", "Header, 2-Pin, Right Angle"
NETLIGHT STATUS: library part LED0, "Typical INFRARED GaAs LED"
OP1 OP4 OP5 OP6 OP7 OP8 OP9 OP10 OP11: library part Optoisolator1, "4-Pin Phototransistor Optocoupler"
P1 P2: library part "Header 12", "Header, 12-Pin"
P3 P5: library part "Header 4H", "Header, 4-Pin, Right Angle"
P4: library part "Header 5", "Header, 5-Pin"
P6: library part Anten
R1 R2 R3 R4 R5 R6 R7 R8 R9 R10 R11 R14 R15 R16 R17 R19 R23 R24 R26 R27 R34 R35 R40 R41 R42 R43 R46 R47 R48 R49 R53 R54 R56 R57 R58 R61 R62 R63 R66 R67 R68 R69 R70 R71 R75 R76 R77 R78 R79: library part "Res Semi", "Semiconductor Resistor"
R12 R13 R18 R20 R21 R22 R25 R28 R29 R30 R31 R32 R33 R36 R37 R38 R39 R44 R45 R50 R51 R52 R55 R59 R60 R64 R65 R72 R73 R74 R80 R81: library part Res1, "Resistor"
S1: library part Component_1_1
SIM1: library part "SIM HOLDER"
SW1 SW2 SW3 SW4 SW5: library part SW-PB
T1 T2: library part "Trans Ideal", "Transformer (Ideal)"
U1: "STM32 ARM-based 32-bit MCU with 128 Kbytes Flash, 64-pin LQFP, Industrial Temperature"
U2 U3: "SIMPLE SWITCHER® 3A Step-Down Voltage Regulator, 5-pin TO-263"
U4 U5 U6: library part "Volt Reg", "Voltage Regulator"
U7: "Integrated DTMF Transceiver with Intel Micro Interface"
U8 U13: library part MAX232, "DUAL EIA-232 DRIVER/RECEIVER"
U9 U14: "High-Voltage, High-Current Darlington Array"
U11: library part LM386M-1, "Low-Voltage Audio Power Amplifier"
U15: "8-bit AVR Microcontroller, 8KB Flash, 512 Bytes EEPROM, 1KB SRAM, 32-pin TQFP, Industrial Grade (-40°C to 85°C)"
X1 X2 X5: library part 16.000MHZ, "Crystal Oscillator"
X4: library part XTAL, "Crystal Oscillator"

## Free pads (board coordinates)
  oct 118.11x118.11 hole 59.06: 0(9215,5140)
  round 255.91 hole 137.8: ""(2160,3160) ""(2160,8740) ""(10890,3160) ""(10890,8740)

## Via types
v1: diameter 50, hole 28, Top Layer to Bottom Layer, tented both sides, 197 vias
v2: diameter 47, hole 28, Top Layer to Bottom Layer, tented both sides, 140 vias
v3: diameter 42, hole 28, Top Layer to Bottom Layer, tented both sides, 78 vias
v4: diameter 45, hole 28, Top Layer to Bottom Layer, tented both sides, 27 vias
v5: diameter 46, hole 28, Top Layer to Bottom Layer, tented both sides, 7 vias
v6: diameter 35, hole 28, Top Layer to Bottom Layer, tented both sides, 4 vias
v7: diameter 44, hole 28, Top Layer to Bottom Layer, tented both sides, 1 vias
v8: diameter 40, hole 28, Top Layer to Bottom Layer, tented both sides, 1 vias

## Nets (pads, with @x,y where several pads share a name; then routed paths per layer and width w, separated by ;. In a path a pad name is that pad's centre, name@x,y a point inside that pad or via, vN(x,y) a via of type N, cw(c..) or ccw(c..) an arc to the next point about the centre after c; other vN are vias at no path point)
2.5V: C15.1 C18.1 C35.2 C37.2 U4.2 U10.5 U10.7 U10.24 U10.31 | length 6699.7
  Top Layer w10: 7815,7040 7850,7005 7850,6415 7865,6400 C35.2@7865,6341.61 ; v1(8120,7040) 8260,7040 8297.28,7002.72 U10.24@8297.28,6947.72 ; v5(8125,6730) 8173.43,6778.43 U10.31@8246.1,6778.43 ; v1(8695,6835) 8658.11,6798.11 U10.7@8565,6798.11 8513.11,6798.11 8505,6790 8505,6765 8511.26,6758.74 U10.5@8565,6758.74 8747.26,6758.74 8775,6731 8775,6665 8853.75,6586.25 C37.2@8915,6586.25
  Top Layer w25: C18.1@6087,8560 6087,8433 6155,8365 6215,8365 6260,8320 6260,8195 6237.4,8172.4 C15.1@6175,8172.4 6175,8115 6165,8105 6050,8105 6030,8085 U4.2@6030,8012.05 6030,7905 6055,7880 6225,7880 6470,7635 6470,7185 6615,7040 7815,7040 v1(8120,7040)
  Bottom Layer w10: v1(8120,7040) 8165,6995 8165,6770 v5(8125,6730)
  Bottom Layer w16: v1(8120,7040) 8165,7085 8650,7085 8695,7040 v1(8695,6835)
2.8V: C14.1 C16.1 C40.2 C41.2 R81.1 U6.2 U10.38 U10.43 U10.45 | length 7829.9
  Top Layer w10: v5(7910,6985) 7910,6635 8010,6535 8290,6535 8316.97,6561.97 U10.38@8316.97,6628.82 ; C41.2@8415.39,6344.63 C41.2@8412.38,6341.61 ; U10.43@8415.39,6628.82 8415.39,6689.61 8420.79,6695 8450,6695 8454.76,6690.24 U10.45@8454.76,6628.82 8454.76,6439.76 8412.38,6397.38 C41.2@8412.38,6341.61 ; v1(8680,6160) 8585,6160 8550,6195 8550,6290 8535,6305 8448.99,6305 C41.2@8412.38,6341.61
  Top Layer w12: v1(8825,6710) 8825,6665 8854,6636 9148,6636 9191,6593 v1(9251,6593)
  Top Layer w16: C14.1@6505,8245 6545,8245 6560,8230 6560,8130 6512.5,8082.5 U6.2@6512.5,8012.05 ; v1(8825,6710) 8852.5,6682.5 C40.2@8915,6682.5
  Top Layer w25: C16.1@6369,8560 6369,8446 6505,8310 C14.1@6505,8245 ; U6.2@6512.5,8012.05 6512.5,7922.5 6545,7890 6645,7890 6730,7805 6730,7295 6900,7125 v5(7910,7125) v1(8120,7125)
  Bottom Layer w10: v5(7910,6985) v5(7910,7125)
  Bottom Layer w12: v1(9251,6593) 9477,6593 9573,6497 v2(9573,6263)
  Bottom Layer w25: v1(8120,7125) 8730,7125 8825,7030 v1(8825,6710) 8825,6200 8785,6160 v1(8680,6160) v1@8670,6160
3.3V: C13.1 C17.1 C38.2 C42.2 L6.2 S1.4 U5.2 U10.6 U10.14 U10.19 U10.26 U10.32 | length 11965.9
  Top Layer w10: U10.32@8246.1,6758.74 8188.74,6758.74 8170,6740 8170,6670 8105,6605 8015,6605 7950,6670 v1(7950,6930) 8085,6930 8138.15,6876.85 U10.26@8246.1,6876.85 ; v1(8295,7185) 8395.71,7084.29 U10.19@8395.71,6947.72 ; U10.14@8494.13,6947.72 8494.13,7004.13 8520,7030 8765,7030 8805,6990 ; v1(8515,7185) 8610,7185 8805,6990 ; U10.6@8565,6778.43 8914.68,6778.43 C38.2@8915,6778.75 C42.2@8915,6875 ; v1(9280,6825) 8965,6825 C42.2@8915,6875 ; 8805,6990 8805,6905 8835,6875 C42.2@8915,6875
  Top Layer w16: U5.2@6995,8012.05 v3(6995,7990) 6995,7925 7030,7890 7100,7890 7150,7840 ; C13.1@7135,8172.4 7130,8167.4 7130,8125 7150,8105 7150,7840 ; v1(8295,7185) 8030,7185 v1(7950,7265) 7833,7382 7433,7382 7150,7665 7150,7840 ; v1(10059,6334) 10058,6333 10353,6038 10353,4237 10400,4190 S1.4@10480,4190
  Top Layer w25: C13.1@7135,8172.4 7187.4,8172.4 7215,8200 C17.1@7215,8560
  Bottom Layer w10: v1(7950,6930) v1(7950,7265)
  Bottom Layer w16: v1(8295,7185) v1(8515,7185) ; v1(9280,6825) 9568,6825 v1(10059,6334)
  Bottom Layer w25: v1(6670,6710) 6765,6615 7400,6615 7485,6700 7485,7120 6995,7610 v3(6995,7990)
4V: K1.2 M1.55 M1.56 M1.57 NETLIGHT.1 STATUS.1 U14.9 | length 13761.9
  Top Layer w10: v1(7690,8505) 7765,8430 7765,7565 7970,7360 8300,7360 8350,7410 8350,7885 8315,7920 U14.9@8189.49,7920 ; v4(8545,8520) 8580,8555 v2(8875,8555) v2(9160,8555)
  Top Layer w16: v2(10165.5,7933.76) M1.55@10392.44,7933.76 ; v2(10165.5,8012.5) M1.57@10392.44,8012.5 ; M1.56@10392.44,7973.13 v2(10619.38,7973.13)
  Bottom Layer w40: v2(10165.5,7933.76) 10165.5,8061.5 10390,8286 ; 10390,8283 10619.38,8053.62 v2(10619.38,7973.13)
  Bottom Layer w50: K1.2@4885,7030 4970,7030 5000,7060 5000,7655 4900,7755 3920,7755 3845,7830 3845,8010 3920,8085 5550,8085 5970,8505 v1(7690,8505) 8530,8505 v4(8545,8520) 8713,8688 10274,8688 10390,8572 10390,8286
5V: C33.2 C55.2 J-LINK.19 K1.9 L1.1 L2.1 L3.1 L7.2 L9.1 L10.2 OP4.4 OP5.4 OP6.4 OP7.4 OP10.4 OP11.4 P5.1 R4.2 U8.16 U13.16 | length 33338
  Top Layer w10: 2905,3065 2975,3135 v1(2975,3205) ; v1(4155,4156.43) OP4.4@4265,4156.43 ; v1(4155,4382.14) OP5.4@4265,4382.14 ; v1(4155,4607.86) OP6.4@4265,4607.86 ; v1(4155,4833.57) v1(4265,4833.57) ; v1(5845,4050) C55.2@5848.2,4050 ; U13.16@5999.49,3830 6045,3875.51 6045,4135 v1(6035,4145)
  Top Layer w12: v1(2055,3750) 2055,3505 2185,3375 2355,3375 2665,3065 2905,3065 4095,3065 ; J-LINK.19@4145,3170 4145,3115 4095,3065 ; K1.9@4595,7030 4670,7030 4730,6970 4730,6735 4980,6485 5400,6485 5578.75,6306.25 5578.75,6173.75 ; P5.1@6015,3138.9 5936.1,3138.9 5875,3200 5455,3200 5320,3065 4095,3065 ; v2(6215,4185) 6765,4185 6835,4115 6835,3880 6785,3830 U8.16@6654.49,3830 ; C33.2@6514.93,4050 6514.93,4114.93 6585,4185
  Top Layer w16: R4.2@5578.75,5990 5578.75,6173.75 5665,6260 5665,6725 5800,6860 6805,6860 6860,6805 ; v1(6270,8655) 6270,8465 6385,8350 L3.1@6385,8292.6 ; L10.2@6800.71,6710 6800.71,6765.71 6840,6805 6860,6805 ; L7.2@7585,6710 L9.1@7455,6710 7455,6770 7420,6805 6860,6805
  Top Layer w20: L2.1@5925,8295 5925,8600 5980,8655 v1(6270,8655) 7035,8655 7065,8625 7065,8410 7030,8375 6895,8375 6880,8360 L1.1@6880,8295
  Bottom Layer w10: v1(2975,3205) 2975,3705 3005,3735 ; v1(4155,4156.43) 4131.43,4156.43 3915,3940 3210,3940 3005,3735 ; v1(4260,5515) v1(4260,5755) ; v1(4265,4833.57) v1@4265,5510 ; v1(5845,4050) 5845,4215 5905,4275 ; v2(6215,4185) 6075,4185 v1(6035,4145) 5905,4275 ; 3005,3735 3775,3735 3878,3632 3992,3632 4020,3660 4020,3870 4110,3960 4680,3960 4825,4105 4825,4585 5010,4770 5770,4770 5905,4635 5905,4275
  Bottom Layer w12: v1(2055,3750) 2055,7855 2115,7915 2680,7915 2740,7855 2740,7455 2835,7360 3560,7360
  Bottom Layer w16: v1(4155,4156.43) v1(4155,4382.14) v1(4155,4607.86) v1(4155,4833.57)
  Bottom Layer w47.24: K1.9@4585,7030 4665,7030 4685,7050 4685,7250 4575,7360 3560,7360 3495,7425 3495,8040 3630,8175 5500,8175 5980,8655 v1(6270,8655)
12V: F1.1 P2.1 | length 772
  Top Layer w39.37: P2.1@2465,8215 P2.1@2465,8220
  Top Layer w50: P2.1@2465,8220 2465,8345 2540,8420 F1.1@3075,8420
  Bottom Layer w50: P2.1@2465,8220 P2.1@2465.91,8220
12V-GND: D3.2 P2.2 | length 1356.1
  Top Layer w50: P2.2@2465,8020 2990,8020 3160,8190 3600,8190 3650,8240 D3.2@3650,8320
24V: OP8.4 OP9.4 OP11.2 P2.3 R78.2 | length 6584.1
  Top Layer w12: v1(3905,5655) 3950,5655 3980,5685 R78.2@3980,5950 ; v1(4140.71,5059.29) OP8.4@4265,5059.29 ; v1(4140.71,5285) OP9.4@4265,5285
  Bottom Layer w16: P2.3@2465,7820 2585,7820 2630,7775 2630,7565 2585,7520 2285,7520 2230,7465 2230,5245 2375,5100 2595,5100 2790,4905 4070,4905 4140.71,4975.71 v1(4140.71,5059.29) v1(4140.71,5285) 4140.71,5429.29 4082.71,5487.29 3962.71,5487.29 3905,5545 v1(3905,5655)
ASK-5V: C63.1 C64.1 L9.2 P4.4 | length 5273.8
  Top Layer w12: L9.2@7454.29,6585 7454.29,6470.71 7490,6435 7550,6435 7615,6370 7615,5880 7485,5750 7485,5245 7495,5235 v1(7530,5235)
  Top Layer w16: C64.1@9188,5325 9255,5325 9335,5245 9335,4760 v1(9300,4725) 9215,4640 P4.4@9215,4150
  Bottom Layer w12: v1(7530,5235) 8345,5235 8410,5170 8410,4710 8505,4615 8750,4615 ; v2(8775,4655) 8775,4640 8750,4615 ; v1(9300,4725) 9305,4725 9302.5,4727.5 9102.5,4727.5 8990,4615 8750,4615
ASK-ANTEN: P4.5 pad.0 | length 245
  Top Layer w25: P4.5@9215,4895 pad.0@9215,5140
ASK-PULSE: P4.2 P4.3 U15.1 | length 2528.3
  Top Layer w12: v1(7730,4715) 7750.24,4694.76 U15.1@7805.35,4694.76
  Top Layer w16: P4.2@9215,3950 P4.3@9215,4050 9305,4050 9365,4110 9365,4540 v1(9330,4575)
  Bottom Layer w16: v1(7730,4715) 7730,4660 7815,4575 v1(9330,4575)
BOOT0: R34.1 SW4.1 U1.60 | length 8418.8
  Top Layer w10: v1(6410,5065) 6421.1,5053.9 U1.60@6497.52,5053.9 ; v1(6965,3335) 6965,3150 7026.1,3088.9 SW4.1@7145,3088.9 SW4.1@7405,3088.9
  Bottom Layer w10: v1(6410,5065) 6405,5060 6465,5060 6500,5025 6965,5025 7010,4980 7010,4860 v6(7045,4825) 7100,4770 7100,3830 7020,3750 4690,3750 4423.19,3483.19 4423.19,3161.81 4530,3055 5725,3055 6005,3335 v1(6965,3335)
DEBUG_RX_RS232: P3.4 U8.7 | length 4802.2
  Top Layer w12: U8.7@6465.24,3529.58 6514.58,3529.58 6537.8,3552.8 v1(6572.2,3552.8) ; P3.4@10670.36,3661.48 v1(10908.52,3661.48)
  Bottom Layer w12: v1(6572.2,3552.8) 6776.6,3552.8 6856.4,3473 10308.6,3473 10497.08,3661.48 v1(10908.52,3661.48)
DEBUG_RX_TTL: U1.30 U8.9 | length 3396.9
  Top Layer w10: v1(5300,3975) 5300,3560 5425,3435 6630,3435 6654.49,3459.49 U8.9@6654.49,3480 ; v1(5760,4670) 5760,4850 5786.73,4876.73 U1.30@6062.48,4876.73 ; U8.9@6674.58,3479.58 U8.9@6685.24,3479.58
  Bottom Layer w10: v1(5300,3975) 5300,4230 5365,4295 5630,4295 5760,4425 v1(5760,4670)
DEBUG_TX_RS232: P3.1 U8.8 | length 4825.8
  Top Layer w12: U8.8@6465.24,3479.58 6554.58,3479.58 v1(6560,3485) ; P3.1@10670.36,3566.99 10736.99,3566.99 10770,3600 10860,3600 10880,3580 v1(10910,3580)
  Bottom Layer w12: v1(6560,3485) 6785,3485 6839,3431 10326,3431 10515,3620 10870,3620 v1(10910,3580)
DEBUG_TX_TTL: U1.29 U8.10 | length 3830.1
  Top Layer w10: v1(5220,3975) 5220,3585 5420,3385 6735,3385 6775,3425 6775,3515 6760.42,3529.58 U8.10@6685.24,3529.58 ; v1(5695,4670) 5695,4826.42 5765,4896.42 U1.29@6062.48,4896.42
  Bottom Layer w10: v1(5220,3975) 5220,4220 5335,4335 5600,4335 5695,4430 v1(5695,4670)
DTMF_INPUT: R16.2 R27.1 U7.2 | length 977.1
  Top Layer w12: U7.2@6400,6394.13 6400,6275 6435,6240 6910,6240 7015,6135 R16.2@7015,6045 R27.1@7110,6045
DTMF_OUTPUT: C21.1 K3.9 R14.2 U7.8 | length 5234.2
  Top Layer w10: U7.8@6100,6394.13 6100,6315 ; v1(6150,6290) 6125,6290 6100,6315 ; C21.1@7245,6220 7245,5945 7210,5910 6895,5910 6870,5935 6870,6035 6860,6045 R14.2@6825,6045 6825,6135 6793.19,6166.81 6193.19,6166.81 6100,6260 6100,6315
  Top Layer w16: K3.9@3760,7030 3895,7030 3955,7090 3955,7235 4015,7295 5160,7295 5370,7085 5370,6625 v1(5540,6455)
  Bottom Layer w16: v1(5540,6455) 5775,6220 6115,6220 6150,6255 v1(6150,6290)
GBUF: R50.2 U10.42 | length 391.8
  Top Layer w10: R50.2@8231.14,6343.23 8231.14,6401.14 8270,6440 8335,6440 8395.71,6500.71 U10.42@8395.71,6628.82
GND: C3.2 C4.2 C5.2 C6.2 C7.2 C8.2 C9.2 C10.2 C11.2 C12.2 C13.2 C14.2 C15.2 C16.2 C17.2 C18.2 C19.2 C20.2 C21.2 C22.2 C23.2 C24.2 C25.1 C27.2 C29.2 C30.2 C31.2 C32.2 C35.1 C37.1 C38.1 C39.2 C40.1 C41.1 C42.1 C43.1 C44.2 C45.2 C46.2 C48.2 C50.2 C51.1 C54.2 C57.1 C59.2 C60.2 C61.2 C62.2 C63.2 C64.2 C65.1 C71.2 CN1.8 CN1.10 D3.1 D5.1 D6.1 D10.2 D11.2 D12.2 D13.2 D14.2 J-LINK.4 J-LINK.6 J-LINK.8 J-LINK.10 J-LINK.12 J-LINK.14 J-LINK.16 J-LINK.18 J-LINK.20 M1.17 M1.18 M1.29 M1.39 M1.45 M1.46 M1.53 M1.54 M1.58 M1.59 M1.61 M1.62 M1.63 M1.64 M1.65 OP8.2 OP9.2 P2.8 P3.3 P4.1 P5.3 P6.2 P7.2 R5.1 R6.2 R7.2 R8.1 R10.1 R12.2 R13.2 R14.1 R15.1 R17.1 R29.2 R30.2 R34.2 R40.2 R41.2 R42.2 R43.2 R54.2 R63.2 R66.2 R67.2 R68.2 R69.2 R70.2 R71.2 R72.2 R77.2 R79.2 S1.6 SIM1.2 SIM1.8 SW1.2 SW2.2 SW3.2 SW5.2 T1.2 T2.2 T2.4 U1.12 U1.18 U1.31 U1.47 U1.63 U2.3 U2.5 U3.3 U3.5 U4.1 U5.1 U6.1 U7.5 U7.10 U8.15 U9.8 U10.4 U10.16 U10.20 U10.21 U10.22 U10.37 U10.40 U10.41 U10.47 U11.2 U11.4 U13.15 U14.8 U15.3 U15.5 U15.21 | length 19073.9
  Top Layer w10: J-LINK.4@3345,3270 v1(3345,3420) ; J-LINK.8@3545,3270 3545,3395 v1(3570,3420) ; R30.2@3682,3670 R29.2@3811,3670 ; v1(3750,7450) 3830,7370 4500,7370 4550,7420 4550,7574.41 4560.59,7585 v3(4600,7585) 4635,7585 4670,7550 4670,7450 4720,7400 4910,7400 4935,7425 4935,7675 4865,7745 R8.1@4500,7745 ; J-LINK.14@3845,3270 3845,3335 4090,3580 v1(4090,3670) ; v1(5790,4260) 5790,4160 5820,4130 5975,4130 6020,4085 6020,3940 5940,3860 5940,3790 5950,3780 U13.15@5999.49,3780 ; v1(5940,4820) 5977.05,4857.05 U1.31@6062.48,4857.05 ; v1(5940,5160) 5970,5160 5985,5145 5985,5125 5997.05,5112.95 U1.18@6062.48,5112.95 ; U7.10@6000,6394.13 6000,6295 v3(6005,6290) ; v2(6090,4050) C57.1@6091.6,4050 ; v8(6190,5320) 6190,5290 6211.1,5268.9 U1.12@6211.1,5202.52 ; U7.5@6250,6394.13 6250,6305 v1(6270,6285) ; U1.47@6407.95,4767.48 6407.95,4677.05 v1(6430,4655) ; U1.63@6497.52,5112.95 6547.95,5112.95 6565,5130 v1(6590,5130) ; U8.15@6654.49,3780 6845,3780 6880,3815 6880,4165 v1(6900,4185) ; C27.2@6795,5800 6795,5847 6806,5858 7125,5858 7149,5834 v2(7244,5834) ; R15.1@6920,5970 6920,5940 6930,5930 7175,5930 v3(7200,5955) 7200,6250 7218.84,6268.84 7320,6268.84 ; C21.2@7320,6220 7320,6268.84 ; C25.1@7320,6322.3 7320,6268.84 ; v1(7370.75,4789.25) U15.21@7474.65,4789.25 ; SW1.2@7787.5,3268.9 v1(8047.5,3268.9) ; U15.5@7805.35,4820.75 7884.25,4820.75 7975,4730 v1(7995,4730) ; U15.3@7810.35,4757.76 7945,4757.76 ; R54.2@7973.14,5845 R63.2@8079.07,5845 ; v1(8180,6595) 8213.82,6628.82 U10.37@8297.28,6628.82 ; 8297.28,6577.28 U10.37@8297.28,6628.82 ; U10.22@8336.65,6947.72 U10.21@8356.34,6947.72 ; U10.40@8356.34,6628.82 8356.34,6676.97 8326.65,6706.65 ; v3(8356.34,7030) U10.21@8356.34,6947.72 ; U10.20@8375.71,6947.72 U10.21@8356.34,6947.72 ; U10.41@8376.02,6628.82 8376.02,6698.98 8368.35,6706.65 8326.65,6706.65 ; U10.16@8454.76,6947.72 8454.76,7019.76 v7(8480,7045) ; U10.47@8494.13,6628.82 8494.13,6505.87 v3(8515,6485) ; v1(8560,3115) 8586.1,3088.9 SW3.2@8690,3088.9 ; U10.4@8565,6739.06 8645.94,6739.06 8685,6700 v1(8715,6700) ; v3(8680,5860) 8710,5860 ; U11.4@8775.51,5815 8730,5815 8710,5835 8710,5860 ; U11.2@8775.51,5915 8735,5915 8710,5890 8710,5860 ; v1(9850,3180) 9883.9,3180 SW2.2@9975,3088.9 ; SIM1.8@9995,4790 v1(10295,4790) ; SIM1.2@9995,5090 v1(10115,5090) ; v1(10220,4140) 10260,4100 S1.6@10480,4100 ; v1(10415,3705) 10490.02,3629.98 P3.3@10670.35,3629.98 ; U10.37@8297.28,6628.82 8297.28,6677.28 8326.65,6706.65
  Top Layer w16: v1(9360.05,8603.05) M1.17@9605.04,8603.05 ; M1.29@9447.56,8011.28 9673.72,8011.28 9727,7958 v1(9727,7861) ; M1.18@9447.56,8444.35 9556.65,8444.35 9645,8356 v1(9645,8258) ; v1(9729,7302) 9762.52,7335.52 M1.39@9762.52,7656.95 ; v2(9859,7964) 9859,7913 10038.11,7733.89 M1.46@10038.11,7656.95 ; v1(9998.5,7210.5) M1.45@9998.5,7656.95 ; v1(10128,7881) 10153.98,7855.02 10285.02,7855.02 M1.53@10392.44,7855.02 ; v2(10146,8271) 10146,8306 10167.46,8327.46 M1.65@10392.44,8327.46 ; M1.54@10392.44,7894.39 10570.61,7894.39 10609,7856 10609,7768 10496,7655 10496,7513 v1(10537,7472) ; M1.58@10392.44,8051.87 10657.13,8051.87 10687,8022 10687,7772 v1(10559,7644) ; M1.59@10392.44,8091.24 10677.76,8091.24 10723,8046 10723,7744 v1(10663,7684) ; M1.61@10392.44,8169.98 10753.02,8169.98 v1(10798,8125) ; M1.62@10392.44,8209.35 10620.35,8209.35 10674,8263 v1(10802,8263) ; M1.63@10392.44,8248.72 10594.72,8248.72 v1(10782,8436) ; M1.64@10392.44,8288.09 10572.09,8288.09 10663,8379 v1(10663,8493)
  Bottom Layer w10: v1(3085,3255) 3085,3125 3130,3080 3365,3080 3395,3110 3395,3220 J-LINK.4@3345,3270 J-LINK.4@3370,3270 ; J-LINK.6@3445,3270 v1(3445,3420) ; v3(3675,5005) 3720,4960 3820,4960 3910,5050 v3(3910,5185) ; v3(8505,5845) 8550,5890 8647.47,5890 8677.47,5860 v3(8680,5860) 8725,5815 8925,5815 8960,5850 v2@8960,6335
  other v1: 5230,5000 5705,5260 6440,5445 5965,5875 6850,6325
  other v2: 10320,3250 4260,3350 5125,3425 2730,3455 4575,3500 6310,3560 5620,3595 9305,3660 9915,3715 7830,3733 7963.67,3733 8097.33,3733 8231,3733 8528,3733 7250,3800 2845,3870 6295,3870 7048,3884 4285,3890 4985,3985 6745,4050 2680,4095 5045,4220 6045,4300 7410,4310 6585,4340 2840,4375 9742,4489 2690,4515 8349,4643 8581,4666 5280,4695 6810,4855 3910,4959.29 8549,5023 5366.49,5030 5463.82,5030 5561.16,5030 5660,5030 7110,5170 9623,5255 6835,5260 3690,5390 5420,5405 4525,5420 6785,5425 7020,5515 8905.4,5520 2785,5545 10007,5626 4525,5655 4845,5670 9308,5770 6605,5795 9658,5841 5025,5985 4510,6025 3905,6050 3430,6125 9237,6156 10635,6260 9472.24,6262.61 8955,6332 9446,6464 3493,6466 4085,6515 10285,6521 8605,6565 5990,6575 8990,6586.25 6390,6590 9550,6623 10945,6650 9238,6711 3950,6880 5050,6905 9646,6915 10620,7085 3880,7140 8795,7185 9321,7222 8050,7305 8535,7410 10954,7421 5985,7480 2950,7555 8020,7640 3715,7695 2190,7750 7445,7910 2180,8155 7915,8625 9592,8756
  other v3: 3675,4008.57 4525,4055 3675,4207.86 4525,4283.57 7950,4365 8170,4365 3675,4407.14 4525,4506.43 3675,4605 8850,4655 4525,4735 8850,4750 3675,4805 8850,4850 8850,4950 5245,5205 8340.2,5520 8080,5845 8292.01,5920 6825,5980 5680,5990 7865,6266.61 8412.38,6266.61 8504.06,6266.61 7955,6341.61 8046.48,6341.61 8595.33,6341.61 8990,6970 8990,7070 5655,7585 3926,7590 5535,7745 4054,7924 4500,7986.42 6120,7990 6605,7990 7085,7990 5540,8015 9055,8025 6505,8170 6625,8170 6043.65,8247.4 6175,8247.4 7001.15,8247.4 7135,8247.4 4790,8285 4925,8285 5245,8285 5380,8285 3924,8299 3460,8320 3500,8320 3540,8320 4440,8480 5565,8480 3926,8650 5805,8720 6085,8720 6370,8720 6650,8720 6930,8720 7215,8720
  other v5: 7045,4755
  other v6: 7920,4255 6395,5800
GND2: K2.4 OP4.2 OP5.2 OP6.2 OP7.2 P2.4 R61.1 R62.1 | length 12816.1
  Top Layer w10: P2.4@2465,7620 2645,7620 2685,7580 v1(2685,7415) ; v1(2645,4910) 2720,4910 2880,5070 3185,5070 3210,5045 3210,4970 3227.19,4952.81 3390,4952.81 3395,4957.81 R62.1@3395,5005 ; v1(2935,4630) 3012.34,4630 3031.17,4648.83 3208.36,4648.83 3230,4627.19 3230,4590 3262.19,4557.81 3470,4557.81 3480,4567.81 3480,4645 3500,4665 3740,4665 3808.57,4733.57 v1(3910,4733.57) ; v1(2935,4745) 2935,4825 2962.19,4852.19 3222.81,4852.19 3235,4840 3235,4775 3247.19,4762.81 3382.81,4762.81 3395,4775 R61.1@3395,4805.71 ; v1(4420,6235) 4480,6295 4480,6605 4395,6690 4395,6800 4425,6830 K2.4@4472.5,6830
  Bottom Layer w10: v1(2685,7415) 2595,7325 2335,7325 2290,7280 2290,6355 2325,6320 2700,6320 3035,5985 3670,5985 3810,6125 4310,6125 v1(4420,6235) ; v1(3910,4055) v1(3910,4280) v1(3910,4505) v1(3910,4733.57)
  Bottom Layer w16: 2190,4940 2190,4820 2305,4705 2795,4705 ; P2.4@2465,7620 2295,7620 2175,7500 2175,4955 2225,4905 2640,4905 v1(2645,4910) ; v1(2935,4630) 2870,4630 2795,4705 ; v1(2935,4745) 2840,4745 2800,4705 2795,4705
IN_Q1: P1.7 R49.1 | length 950
  Top Layer w12: P1.7@2465,4600 2720,4600 2800,4680 3300,4680 3320,4660 R49.1@3320,4606.43
IN_Q2: P1.8 R48.1 | length 928.1
  Top Layer w12: P1.8@2465,4400 2715,4400 2780,4465 3300,4465 3320,4445 R48.1@3320,4407.14
IN_Q3: P1.9 R47.1 | length 945.6
  Top Layer w12: P1.9@2465,4200 2760,4200 2840,4280 3295,4280 3320,4255 R47.1@3320,4207.86
IN_Q4: P1.10 R46.1 | length 944.9
  Top Layer w12: P1.10@2465,4000 2760,4000 2840,4080 3295,4080 3320,4055 R46.1@3320,4008.57
INPUT-4V: C19.1 D8.1 K1.3 L4.2 R9.2 | length 5123.2
  Top Layer w10: v1(4027,8540) 4057,8570 4057,8680 4107,8730 D8.1@4440,8730 ; R9.2@4500,7585 4500,7670
  Top Layer w12: v1(3210,7695) 3210,7550 3310,7450 3527.5,7450 3612.5,7535 3769,7535 3837,7467 v1(4033,7467)
  Top Layer w47.24: v1(4202,7590) 4314,7590 4394,7670 4500,7670 v1(4660,7670) ; v1(4715,7670) 4785,7670 4810,7645 L4.2@4810,7545
  Bottom Layer w12: v1(3210,7695) 3345,7830 3345,8465 3420,8540 v1(4027,8540) ; v1(4033,7467) 4033,7528 4095,7590 v1(4202,7590)
  Bottom Layer w47.24: v1(4660,7670) v1(4715,7670) 4745,7670 4785,7630 4785,6970 4825,6930 K1.3@4885,6930
INPUT-5V: C20.1 D4.1 D7.1 D9.1 D15.1 D16.1 D23.1 K1.8 K1.10 K2.10 K3.10 K4.10 K5.10 L5.2 L8.2 R11.2 U9.9 | length 11689.6
  Top Layer w10: D15.1@3935,6575 D15.1@3945,6585
  Top Layer w12: v1(5220,7545) 5425,7545 5460,7510 R11.2@5535,7510 5570,7510 5590,7530 5590,7635 5640,7685 5640,7745 ; D9.1@5565,8730 5610,8730 5640,8700 5640,7745 ; U9.9@6370,7289.49 6370,7485 6235,7620 5765,7620 5640,7745
  Top Layer w25: L8.2@7323.57,6710 v1(7323.57,6711.43)
  Top Layer w59.06: C20.1@4191,7943.33 4191,7871 4217,7845 v2(4269,7845) ; 5120,7800 v1(5165,7755) 5220,7700 v1(5220,7660) v1(5220,7600) v1(5220,7545)
  Bottom Layer w10: v4(3120,6575) 3175,6575 3227.5,6627.5 K5.10@3227.5,6730 3227.5,6757.5 3250,6780 3530,6780 ; v4(3525,6575) 3605,6575 3640,6610 K4.10@3640,6730 3580,6730 3530,6780 ; v4(3945,6575) 4025,6575 4060,6610 K3.10@4060,6730 3985,6730 3935,6780 ; v4(4365,6575) 4440,6575 4472.5,6607.5 K2.10@4472.5,6730 ; K1.8@4585,6930 4530,6875 4530,6750 4510,6730 K2.10@4472.5,6730 ; v4(4775,6575) 4850,6575 4885,6610 4885,6615 ; K1.10@4885,6730 4885,6655 4925,6615 ; 3530,6780 3935,6780 ; 3935,6780 4365,6780 4415,6730 K2.10@4472.5,6730
  Bottom Layer w25: 5220,7410 5300,7330 7075,7330 7323.57,7081.43 v1(7323.57,6711.43)
  Bottom Layer w50: K1.8@4585,6930 4665,6930 4735,6860 4735,6715 4835,6615 4885,6615 4925,6615 4980,6615 5220,6855 5220,7410 v1(5220,7545)
  Bottom Layer w59.06: v2@4255,7845 5075,7845 v1(5165,7755) 5220,7700
  Bottom Layer w60: v1(5220,7545) v1(5220,7600) v1(5220,7660) 5220,7700
INTERCOM_IRQ: OP11.3 R79.1 U1.33 | length 2925.3
  Top Layer w10: R79.1@4450,5655 4450,5560 4480,5530 4825,5530 4910,5445 4910,4655 4960,4605 6025,4605 6132.36,4712.36 U1.33@6132.36,4767.48
  Top Layer w16: OP11.3@4260,5655 R79.1@4450,5655
JNTRST: J-LINK.3 R33.1 U1.56 | length 5345.7
  Top Layer w10: R33.1@3295,3595 3295,3220 J-LINK.3@3345,3170 ; v1(6350,5020) 6355,5015 6375,5015 6414.84,4975.16 U1.56@6497.52,4975.16
  Bottom Layer w10: J-LINK.3@3345,3170 3295,3220 3295,3575 3400,3680 3750,3680 3830,3600 4280,3600 4580,3900 6070,3900 6280,4110 6280,4735.46 6185,4830.46 6185,4885 6215,4915 6245,4915 v1(6350,5020)
JTCK: J-LINK.9 R30.1 U1.49 | length 4856.3
  Top Layer w10: v1(6350,4895) 6407.64,4837.36 U1.49@6497.52,4837.36
  Bottom Layer w10: v4(3685,3595) 3685,3550 3645,3510 J-LINK.9@3645,3170 3645,3115 3690,3070 4290,3070 4355,3135 4355,3525 4655,3825 6100,3825 6350,4075 v1(6350,4895)
JTDI: J-LINK.5 R32.1 U1.50 | length 5124.8
  Top Layer w10: R32.1@3424,3595 3424,3504 3395,3475 3395,3220 J-LINK.5@3445,3170 ; v4(6420,4910) 6420,4885.36 6448.31,4857.05 U1.50@6497.52,4857.05
  Bottom Layer w10: J-LINK.5@3445,3170 3445,3085 3490,3040 4300,3040 4380,3120 4380,3515 4665,3800 6110,3800 6375,4065 6375,4810 6420,4855 v4(6420,4910)
JTDO: J-LINK.13 R28.1 U1.55 | length 4713.6
  Top Layer w10: J-LINK.13@3845,3170 3795.52,3219.48 3795.52,3370.52 3940,3515 R28.1@3940,3595 ; v1(6375,4955) 6375.47,4955.47 U1.55@6497.52,4955.47
  Bottom Layer w10: J-LINK.13@3845,3170 3915,3100 4280,3100 4330,3150 4330,3540 4640,3850 6093.89,3850 6330,4086.11 6330,4815 6305,4840 6305,4930 6330,4955 v1(6375,4955)
JTMS: J-LINK.7 R31.1 U1.46 | length 4526.6
  Top Layer w10: J-LINK.7@3545,3170 3545,3185 3495,3235 3495,3475 3553,3533 v4(3553,3595) ; v1@6240,4850 v1(6230,4860) 6265,4860 6280,4845 6360,4845 6388.27,4816.73 U1.46@6388.27,4767.48
  Bottom Layer w10: v4(3553,3595) 3593,3635 3725,3635 3800,3560 4295,3560 4610,3875 6085,3875 6305,4095 6305,4785 v1(6230,4860)